# EAGLE board TouchPanel_ver _4 (EAGLE 6.1), part 1 of 2
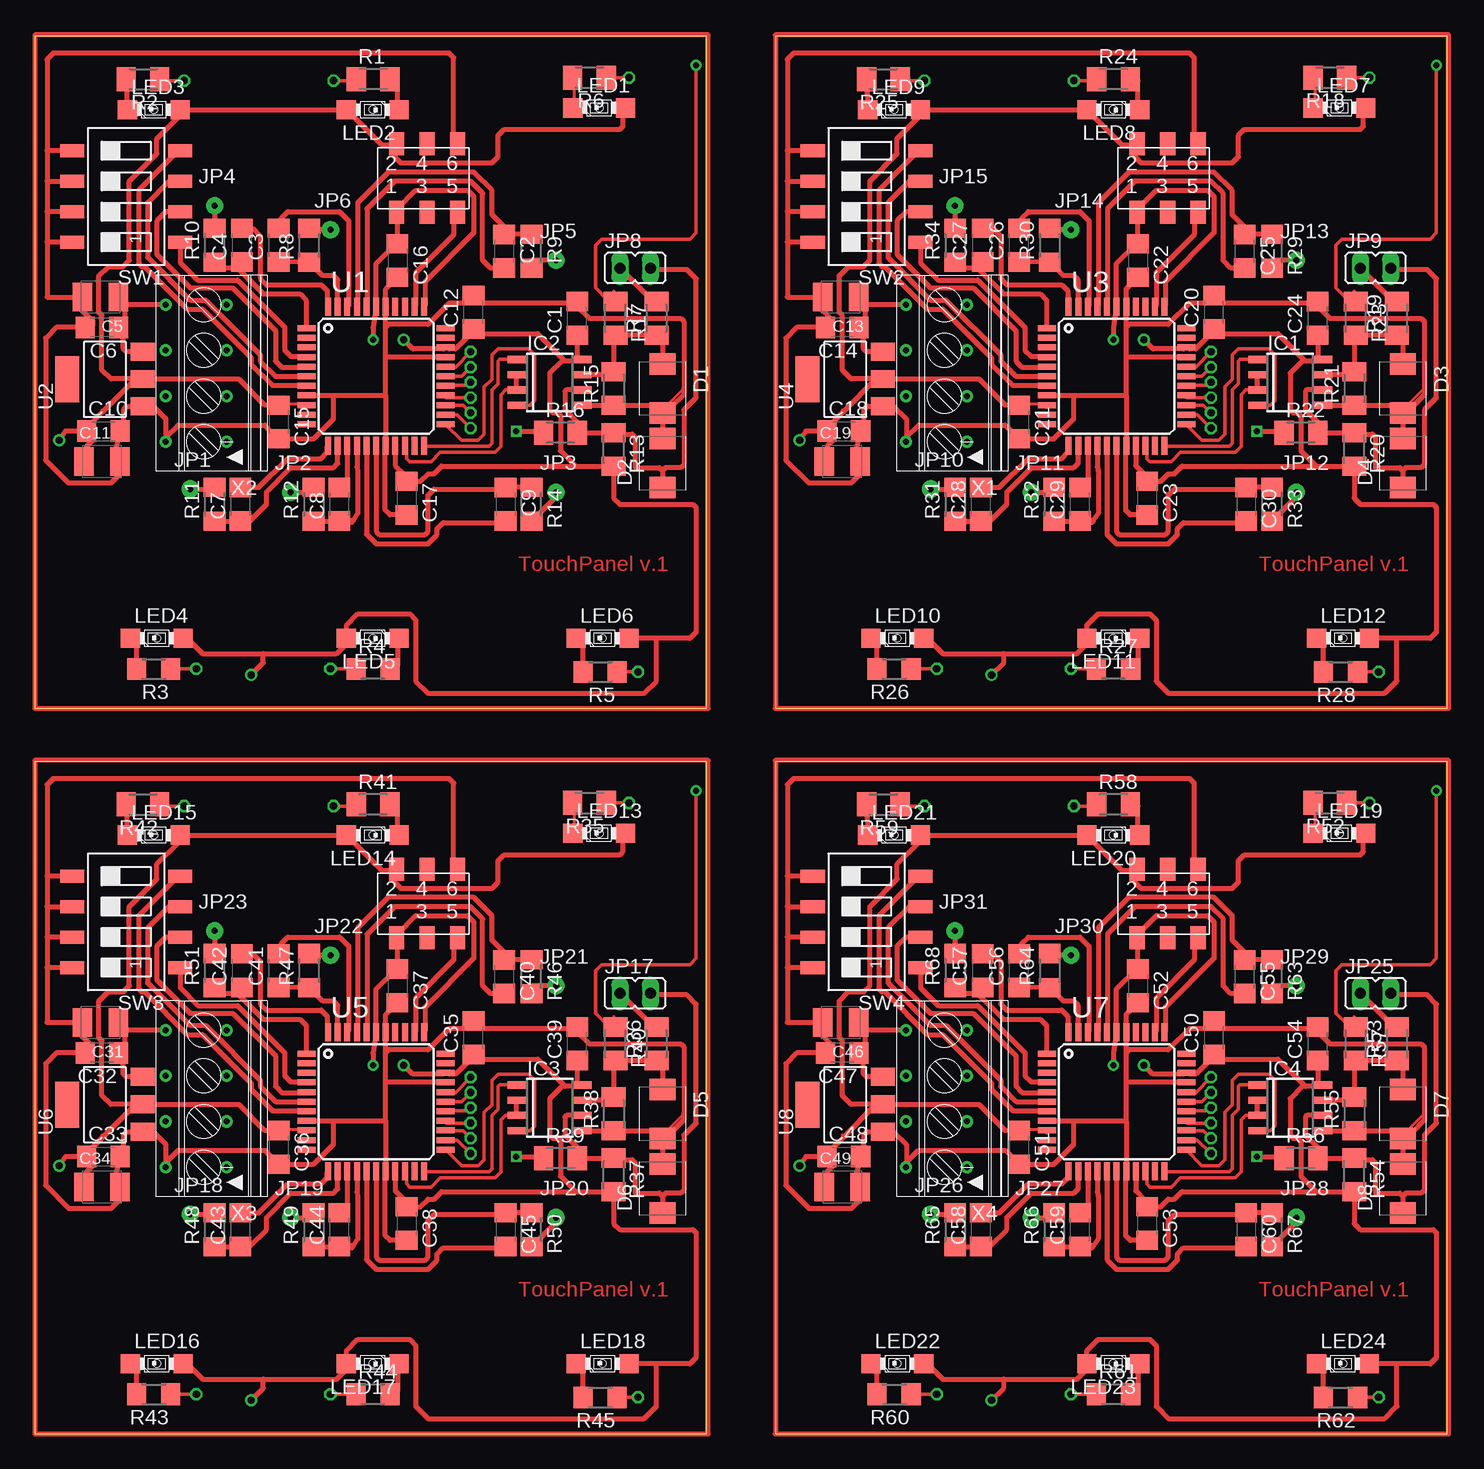
[diagram p0: board, top side]
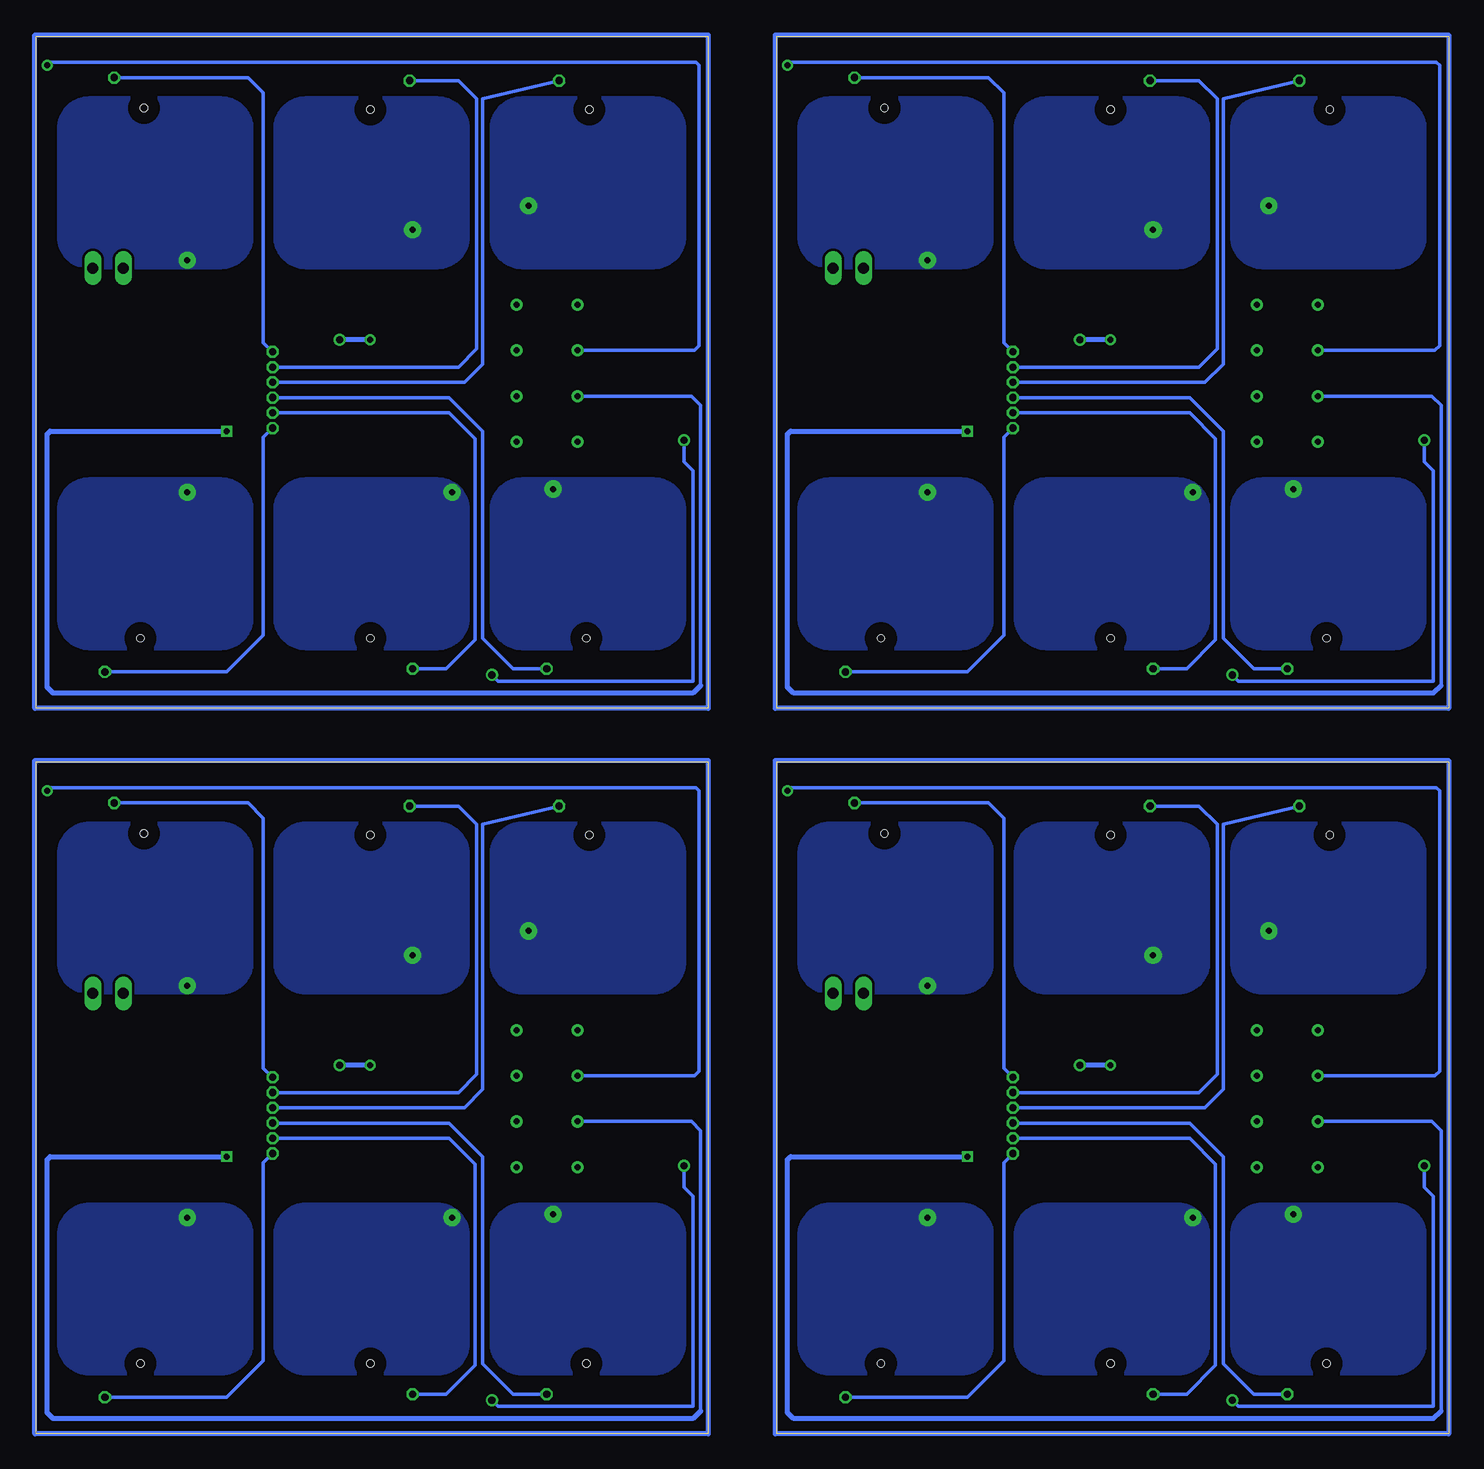
[diagram p1: board, bottom side, seen from below]

Size 117.72 x 116.45 mm. Coordinates in mm from the lower left corner, seen from the top.
Outline: 0,60.45 56,60.45 56,116.45 0,116.45 0,60.45
Outline: 61.72,60.45 117.72,60.45 117.72,116.45 61.72,116.45 61.72,60.45
Outline: 0,0 56,0 56,56 0,56 0,0
Outline: 61.72,0 117.72,0 117.72,56 61.72,56 61.72,0
Copper layers (1*16): Top 0.035mm / dielectric 1.5mm / Bottom 0.035mm
Design rules: minimum track width 10mil, minimum drill 24mil, track to track 8mil, track to pad 8mil, pad to pad 8mil, via to via 8mil, smd to smd 8mil, copper to edge 40mil, drill to drill 8mil, minimum pad ring 10mil, minimum via ring 8mil, stop-mask expansion 4mil, vias tented up to drill 0mil, thermal gap 10mil

## Footprints (pad centres in the part's own frame; a part is rotated, then mirrored left to right if it is on the bottom)
C1206 = smd 1.6 x 1.8: 1 -1.4,0; 2 1.4,0
SMC_B = smd 1.6 x 2.4: + -1.5,0; - 1.5,0
SMBJ = smd 1.78 x 2.16: A 2.04,0; C -2.03,0
D_R-PDSO-G8 = smd 0.6 x 1.5: 1 -1.905,-2.75; 2 -0.635,-2.75; 3 0.635,-2.75; 4 1.905,-2.75; 5 1.905,2.75; 6 0.635,2.75; 7 -0.635,2.75; 8 -1.905,2.75
1X01 = drill 0.5 pad 1.422: 1 0,0
2X03_SMD = smd 0.635 x 1.27: 1 0.635,-1.27; 2 0.635,3.81; 3 3.175,-1.27; 4 3.175,3.81; 5 5.715,-1.27; 6 5.715,3.81; P$1 1.27,3.81; P$2 3.81,3.81; P$3 6.35,3.81; P$4 1.27,-1.27; P$5 3.81,-1.27; P$6 6.35,-1.27; P$7 6.35,4.445; P$8 5.715,4.445; P$9 3.81,4.445; P$10 3.175,4.445; P$11 1.27,4.445; P$12 0.635,4.445; P$13 0.635,-1.905; P$14 1.27,-1.905; P$15 3.175,-1.905; P$16 3.81,-1.905; P$17 5.715,-1.905; P$18 6.35,-1.905
JP1 = drill 0.914 long: 1 0,-1.27; 2 0,1.27
MINI-TOPLED-SANTANA = smd 1.6 x 1.6: A 0,2.2; C 0,-2.2 | hole 0.6: 0,0
M1206 = smd 1.6 x 2: 1 -1.4,0; 2 1.4,0
R1206 = smd 1.6 x 1.803: 1 -1.422,0; 2 1.422,0
SMS-004 = smd 1.092 x 2.007: 1 -3.81,-4.496; 2 -1.27,-4.496; 3 1.27,-4.496; 4 3.81,-4.496; 5 3.81,4.496; 6 1.27,4.496; 7 -1.27,4.496; 8 -3.81,4.496
TQFP44 = smd 1.5 x 0.5: 1 -5.8,4; 2 -5.8,3.2; 3 -5.8,2.4; 4 -5.8,1.6; 5 -5.8,0.8; 6 -5.8,0; 7 -5.8,-0.8; 8 -5.8,-1.6; 9 -5.8,-2.4; 10 -5.8,-3.2; 11 -5.8,-4; 23 5.8,-4; 24 5.8,-3.2; 25 5.8,-2.4; 26 5.8,-1.6; 27 5.8,-0.8; 28 5.8,0; 29 5.8,0.8; 30 5.8,1.6; 31 5.8,2.4; 32 5.8,3.2; 33 5.8,4 | smd 0.5 x 1.5: 12 -4,-5.8; 13 -3.2,-5.8; 14 -2.4,-5.8; 15 -1.6,-5.8; 16 -0.8,-5.8; 17 0,-5.8; 18 0.8,-5.8; 19 1.6,-5.8; 20 2.4,-5.8; 21 3.2,-5.8; 22 4,-5.8; 34 4,5.8; 35 3.2,5.8; 36 2.4,5.8; 37 1.6,5.8; 38 0.8,5.8; 39 0,5.8; 40 -0.8,5.8; 41 -1.6,5.8; 42 -2.4,5.8; 43 -3.2,5.8; 44 -4,5.8
SOT223 = smd 1.499 x 2.007: 1 -2.261,-3.15; 2 0.025,-3.15; 3 2.311,-3.15 | smd 3.81 x 2.007: 4 0,3.15
1705566 = drill 0.5 pad 0.9: 1.1 -5.715,-1.25; 1.2 -5.715,3.83; 2.1 -1.905,-1.25; 2.2 -1.905,3.83; 3.1 1.905,-1.25; 3.2 1.905,3.83; 4.1 5.715,-1.25; 4.2 5.715,3.83

## Placement (x,y rotation side)
C1  100n  [C1206]  45.21,92.96 90 top
C2  22n  [C1206]  39.12,98.55 270 top
C3  22n  [C1206]  20.32,99.06 90 top
C4  22n  [C1206]  17.27,99.06 90 top
C5  10u/16  [SMC_B]  5.46,94.74 180 top
C6  100n  [C1206]  5.59,92.2 180 top
C7  22n  [C1206]  17.14,77.47 90 top
C8  22n  [C1206]  25.4,77.47 90 top
C9  22n  [C1206]  39.24,77.47 270 top
C10  100n  [C1206]  5.71,83.57 0 top
C11  10u/16  [SMC_B]  5.59,81.03 0 top
C12  100n  [C1206]  36.58,93.47 90 top
C13  10u/16  [SMC_B]  67.18,94.74 180 top
C14  100n  [C1206]  67.31,92.2 180 top
C15  100n  [C1206]  20.32,84.33 270 top
C16  100n  [C1206]  30.23,97.79 270 top
C17  100n  [C1206]  30.99,77.98 270 top
C18  100n  [C1206]  67.44,83.57 0 top
C19  10u/16  [SMC_B]  67.31,81.03 0 top
C20  100n  [C1206]  98.3,93.47 90 top
C21  100n  [C1206]  82.04,84.33 270 top
C22  100n  [C1206]  91.95,97.79 270 top
C23  100n  [C1206]  92.71,77.98 270 top
C24  100n  [C1206]  106.93,92.96 90 top
C25  22n  [C1206]  100.84,98.55 270 top
C26  22n  [C1206]  82.04,99.06 90 top
C27  22n  [C1206]  78.99,99.06 90 top
C28  22n  [C1206]  78.87,77.47 90 top
C29  22n  [C1206]  87.12,77.47 90 top
C30  22n  [C1206]  100.97,77.47 270 top
C31  10u/16  [SMC_B]  5.46,34.29 180 top
C32  100n  [C1206]  5.59,31.75 180 top
C33  100n  [C1206]  5.71,23.11 0 top
C34  10u/16  [SMC_B]  5.59,20.57 0 top
C35  100n  [C1206]  36.58,33.02 90 top
C36  100n  [C1206]  20.32,23.88 270 top
C37  100n  [C1206]  30.23,37.34 270 top
C38  100n  [C1206]  30.99,17.53 270 top
C39  100n  [C1206]  45.21,32.51 90 top
C40  22n  [C1206]  39.12,38.1 270 top
C41  22n  [C1206]  20.32,38.61 90 top
C42  22n  [C1206]  17.27,38.61 90 top
C43  22n  [C1206]  17.14,17.02 90 top
C44  22n  [C1206]  25.4,17.02 90 top
C45  22n  [C1206]  39.24,17.02 270 top
C46  10u/16  [SMC_B]  67.18,34.29 180 top
C47  100n  [C1206]  67.31,31.75 180 top
C48  100n  [C1206]  67.44,23.11 0 top
C49  10u/16  [SMC_B]  67.31,20.57 0 top
C50  100n  [C1206]  98.3,33.02 90 top
C51  100n  [C1206]  82.04,23.88 270 top
C52  100n  [C1206]  91.95,37.34 270 top
C53  100n  [C1206]  92.71,17.53 270 top
C54  100n  [C1206]  106.93,32.51 90 top
C55  22n  [C1206]  100.84,38.1 270 top
C56  22n  [C1206]  82.04,38.61 90 top
C57  22n  [C1206]  78.99,38.61 90 top
C58  22n  [C1206]  78.87,17.02 90 top
C59  22n  [C1206]  87.12,17.02 90 top
C60  22n  [C1206]  100.97,17.02 270 top
D1  [SMBJ]  52.32,87.12 270 top
D2  [SMBJ]  52.32,80.9 90 top
D3  [SMBJ]  114.05,87.12 270 top
D4  [SMBJ]  114.05,80.9 90 top
D5  [SMBJ]  52.32,26.67 270 top
D6  [SMBJ]  52.32,20.45 90 top
D7  [SMBJ]  114.05,26.67 270 top
D8  [SMBJ]  114.05,20.45 90 top
IC1  ST3485  [D_R-PDSO-G8]  104.65,87.63 270 top
IC2  ST3485  [D_R-PDSO-G8]  42.93,87.63 270 top
IC3  ST3485  [D_R-PDSO-G8]  42.93,27.18 270 top
IC4  ST3485  [D_R-PDSO-G8]  104.65,27.18 270 top
JP1  [1X01]  12.95,78.74 0 top
JP2  [1X01]  21.34,78.49 0 top
JP3  [1X01]  43.43,78.49 0 top
JP4  [1X01]  14.99,102.36 0 top
JP5  [1X01]  43.43,97.79 0 top
JP6  [1X01]  24.64,100.33 0 top
JP7  PINHD-2X3_SMDSMD  [2X03_SMD]  29.21,103.38 0 top
JP8  terminator  [JP1]  50.04,97.16 270 top
JP9  terminator  [JP1]  111.76,97.16 270 top
JP10  [1X01]  74.68,78.74 0 top
JP11  [1X01]  83.06,78.49 0 top
JP12  [1X01]  105.16,78.49 0 top
JP13  [1X01]  105.16,97.79 0 top
JP14  [1X01]  86.36,100.33 0 top
JP15  [1X01]  76.71,102.36 0 top
JP16  PINHD-2X3_SMDSMD  [2X03_SMD]  90.93,103.38 0 top
JP17  terminator  [JP1]  50.04,36.7 270 top
JP18  [1X01]  12.95,18.29 0 top
JP19  [1X01]  21.34,18.03 0 top
JP20  [1X01]  43.43,18.03 0 top
JP21  [1X01]  43.43,37.34 0 top
JP22  [1X01]  24.64,39.88 0 top
JP23  [1X01]  14.99,41.91 0 top
JP24  PINHD-2X3_SMDSMD  [2X03_SMD]  29.21,42.93 0 top
JP25  terminator  [JP1]  111.76,36.7 270 top
JP26  [1X01]  74.68,18.29 0 top
JP27  [1X01]  83.06,18.03 0 top
JP28  [1X01]  105.16,18.03 0 top
JP29  [1X01]  105.16,37.34 0 top
JP30  [1X01]  86.36,39.88 0 top
JP31  [1X01]  76.71,41.91 0 top
JP32  PINHD-2X3_SMDSMD  [2X03_SMD]  90.93,42.93 0 top
LED1  green  [MINI-TOPLED-SANTANA]  47.04,110.5 270 top
LED2  green  [MINI-TOPLED-SANTANA]  28.17,110.36 90 top
LED3  green  [MINI-TOPLED-SANTANA]  9.91,110.36 270 top
LED4  green  [MINI-TOPLED-SANTANA]  10.17,66.3 270 top
LED5  green  [MINI-TOPLED-SANTANA]  28.17,66.3 90 top
LED6  green  [MINI-TOPLED-SANTANA]  47.33,66.3 270 top
LED7  green  [MINI-TOPLED-SANTANA]  108.76,110.5 270 top
LED8  green  [MINI-TOPLED-SANTANA]  89.9,110.36 90 top
LED9  green  [MINI-TOPLED-SANTANA]  71.63,110.36 270 top
LED10  green  [MINI-TOPLED-SANTANA]  71.89,66.3 270 top
LED11  green  [MINI-TOPLED-SANTANA]  89.9,66.3 90 top
LED12  green  [MINI-TOPLED-SANTANA]  109.05,66.3 270 top
LED13  green  [MINI-TOPLED-SANTANA]  47.04,50.04 270 top
LED14  green  [MINI-TOPLED-SANTANA]  28.17,49.91 90 top
LED15  green  [MINI-TOPLED-SANTANA]  9.91,49.91 270 top
LED16  green  [MINI-TOPLED-SANTANA]  10.17,5.85 270 top
LED17  green  [MINI-TOPLED-SANTANA]  28.17,5.85 90 top
LED18  green  [MINI-TOPLED-SANTANA]  47.33,5.85 270 top
LED19  green  [MINI-TOPLED-SANTANA]  108.76,50.04 270 top
LED20  green  [MINI-TOPLED-SANTANA]  89.9,49.91 90 top
LED21  green  [MINI-TOPLED-SANTANA]  71.63,49.91 270 top
LED22  green  [MINI-TOPLED-SANTANA]  71.89,5.85 270 top
LED23  green  [MINI-TOPLED-SANTANA]  89.9,5.85 90 top
LED24  green  [MINI-TOPLED-SANTANA]  109.05,5.85 270 top
R1  220  [M1206]  28.19,112.9 0 top
R2  220  [M1206]  9.02,112.9 180 top
R3  220  [R1206]  9.91,63.75 180 top
R4  220  [R1206]  28.19,63.75 0 top
R5  220  [R1206]  47.12,63.5 180 top
R6  220  [M1206]  46.23,113.03 180 top
R7  130R  [M1206]  51.82,92.96 90 top
R8  10k  [R1206]  22.86,99.06 90 top
R9  10k  [R1206]  41.4,98.55 270 top
R10  10k  [R1206]  14.99,99.06 90 top
R11  10k  [R1206]  14.99,77.47 90 top
R12  10k  [R1206]  23.24,77.47 90 top
R13  750R  [M1206]  48.26,82.04 270 top
R14  10k  [R1206]  41.4,77.47 270 top
R15  750R  [M1206]  48.26,87.12 90 top
R16  10R  [M1206]  43.81,83.44 0 top
R17  10R  [M1206]  48.39,92.96 270 top
R18  220  [M1206]  107.95,113.03 180 top
R19  130R  [M1206]  113.54,92.96 90 top
R20  750R  [M1206]  109.98,82.04 270 top
R21  750R  [M1206]  109.98,87.12 90 top
R22  10R  [M1206]  105.54,83.44 0 top
R23  10R  [M1206]  110.11,92.96 270 top
R24  220  [M1206]  89.92,112.9 0 top
R25  220  [M1206]  70.74,112.9 180 top
R26  220  [R1206]  71.63,63.75 180 top
R27  220  [R1206]  89.92,63.75 0 top
R28  220  [R1206]  108.84,63.5 180 top
R29  10k  [R1206]  103.12,98.55 270 top
R30  10k  [R1206]  84.58,99.06 90 top
R31  10k  [R1206]  76.71,77.47 90 top
R32  10k  [R1206]  84.96,77.47 90 top
R33  10k  [R1206]  103.12,77.47 270 top
R34  10k  [R1206]  76.71,99.06 90 top
R35  220  [M1206]  46.23,52.58 180 top
R36  130R  [M1206]  51.82,32.51 90 top
R37  750R  [M1206]  48.26,21.59 270 top
R38  750R  [M1206]  48.26,26.67 90 top
R39  10R  [M1206]  43.81,22.99 0 top
R40  10R  [M1206]  48.39,32.51 270 top
R41  220  [M1206]  28.19,52.45 0 top
R42  220  [M1206]  9.02,52.45 180 top
R43  220  [R1206]  9.91,3.3 180 top
R44  220  [R1206]  28.19,3.3 0 top
R45  220  [R1206]  47.12,3.05 180 top
R46  10k  [R1206]  41.4,38.1 270 top
R47  10k  [R1206]  22.86,38.61 90 top
R48  10k  [R1206]  14.99,17.02 90 top
R49  10k  [R1206]  23.24,17.02 90 top
R50  10k  [R1206]  41.4,17.02 270 top
R51  10k  [R1206]  14.99,38.61 90 top
R52  220  [M1206]  107.95,52.58 180 top
R53  130R  [M1206]  113.54,32.51 90 top
R54  750R  [M1206]  109.98,21.59 270 top
R55  750R  [M1206]  109.98,26.67 90 top
R56  10R  [M1206]  105.54,22.99 0 top
R57  10R  [M1206]  110.11,32.51 270 top
R58  220  [M1206]  89.92,52.45 0 top
R59  220  [M1206]  70.74,52.45 180 top
R60  220  [R1206]  71.63,3.3 180 top
R61  220  [R1206]  89.92,3.3 0 top
R62  220  [R1206]  108.84,3.05 180 top
R63  10k  [R1206]  103.12,38.1 270 top
R64  10k  [R1206]  84.58,38.61 90 top
R65  10k  [R1206]  76.71,17.02 90 top
R66  10k  [R1206]  84.96,17.02 90 top
R67  10k  [R1206]  103.12,17.02 270 top
R68  10k  [R1206]  76.71,38.61 90 top
SW1  SWS004  [SMS-004]  7.62,103.12 90 top
SW2  SWS004  [SMS-004]  69.34,103.12 90 top
SW3  SWS004  [SMS-004]  7.62,42.67 90 top
SW4  SWS004  [SMS-004]  69.34,42.67 90 top
U1  XMEGA-A4TQFP  [TQFP44]  28.45,88.14 0 top
U2  SPX1117M3-L-3-3  [SOT223]  5.84,87.88 90 top
U3  XMEGA-A4TQFP  [TQFP44]  90.17,88.14 0 top
U4  SPX1117M3-L-3-3  [SOT223]  67.56,87.88 90 top
U5  XMEGA-A4TQFP  [TQFP44]  28.45,27.69 0 top
U6  SPX1117M3-L-3-3  [SOT223]  5.84,27.43 90 top
U7  XMEGA-A4TQFP  [TQFP44]  90.17,27.69 0 top
U8  SPX1117M3-L-3-3  [SOT223]  67.56,27.43 90 top
X1  1705566  [1705566]  76.45,88.39 90 top
X2  1705566  [1705566]  14.73,88.39 90 top
X3  1705566  [1705566]  14.73,27.94 90 top
X4  1705566  [1705566]  76.45,27.94 90 top

## Library data of the parts
C1-C60 R1-R68 = rcl
D1-D8 = diode
IC1-IC4 = 751xx
JP1-JP7 JP10-JP16 JP18-JP24 JP26-JP32 = pinhead
JP8 JP9 JP17 JP25 = jumper
LED1-LED24 = led
SW1-SW4 = smd-special
U1 U3 U5 U7 = avr-7
U2 U4 U6 U8 = burr-brown; MPN: REG1117; OC_FARNELL: 1097566; OC_NEWARK: 14P6981
X1-X4 = con-phoenix-3.81; OC_FARNELL: unknown; OC_NEWARK: unknown

## Nets
+3V1: C18.1 C19.+ C20.1 C21.1 C22.1 C23.1 C24.1 IC1.8 JP16.2 LED7.A LED8.A LED9.A LED10.A LED11.A LED12.A R20.2 U3.9 U3.19 U3.31 U3.39 U4.2
+3V2: C33.1 C34.+ C35.1 C36.1 C37.1 C38.1 C39.1 IC3.8 JP24.2 LED13.A LED14.A LED15.A LED16.A LED17.A LED18.A R37.2 U5.9 U5.19 U5.31 U5.39 U6.2
+3V3: C1.1 C10.1 C11.+ C12.1 C15.1 C16.1 C17.1 IC2.8 JP7.2 LED1.A LED2.A LED3.A LED4.A LED5.A LED6.A R13.2 U1.9 U1.19 U1.31 U1.39 U2.2
+3V4: C48.1 C49.+ C50.1 C51.1 C52.1 C53.1 C54.1 IC4.8 JP32.2 LED19.A LED20.A LED21.A LED22.A LED23.A LED24.A R54.2 U7.9 U7.19 U7.31 U7.39 U8.2
+5V: C5.+ C6.1 U2.3 X2.4.2
+5V1: C13.+ C14.1 U4.3 X1.4.2
+5V2: C31.+ C32.1 U6.3 X3.4.2
+5V3: C46.+ C47.1 U8.3 X4.4.2
GND: C1.2 C5.- C6.2 C10.2 C11.- C12.2 C15.2 C16.2 C17.2 D1.A D2.A IC2.5 JP7.6 R15.1 SW1.5 SW1.6 SW1.7 SW1.8 U1.8 U1.18 U1.30 U1.38 U2.1 X2.1.2
GND1: C13.- C14.2 C18.2 C19.- C20.2 C21.2 C22.2 C23.2 C24.2 D3.A D4.A IC1.5 JP16.6 R21.1 SW2.5 SW2.6 SW2.7 SW2.8 U3.8 U3.18 U3.30 U3.38 U4.1 X1.1.2
GND2: C31.- C32.2 C33.2 C34.- C35.2 C36.2 C37.2 C38.2 C39.2 D5.A D6.A IC3.5 JP24.6 R38.1 SW3.5 SW3.6 SW3.7 SW3.8 U5.8 U5.18 U5.30 U5.38 U6.1 X3.1.2
GND3: C46.- C47.2 C48.2 C49.- C50.2 C51.2 C52.2 C53.2 C54.2 D7.A D8.A IC4.5 JP32.6 R55.1 SW4.5 SW4.6 SW4.7 SW4.8 U7.8 U7.18 U7.30 U7.38 U8.1 X4.1.2
JP1: JP1.1 R11.2
JP2: JP2.1 R12.2
JP3: JP3.1 R14.2
JP4: JP4.1 R10.2
JP5: JP5.1 R9.2
JP6: JP6.1 R8.2
JP7: JP10.1 R31.2
JP8: JP11.1 R32.2
JP9: JP12.1 R33.2
JP10: JP13.1 R29.2
JP11: JP15.1 R34.2
JP12: JP14.1 R30.2
JP13: JP18.1 R48.2
JP14: JP19.1 R49.2
JP15: JP20.1 R50.2
JP16: JP21.1 R46.2
JP17: JP23.1 R51.2
JP18: JP22.1 R47.2
JP19: JP26.1 R65.2
JP20: JP27.1 R66.2
JP21: JP28.1 R67.2
JP22: JP29.1 R63.2
JP23: JP31.1 R68.2
JP24: JP30.1 R64.2
N$1: LED2.C R1.2
N$2: LED3.C R2.2
N$3: LED4.C R3.2
N$4: LED5.C R4.2
N$5: LED6.C R5.2
N$6: R17.1 X2.3.2
N$7: JP8.1 R7.2
N$8: R16.1 X2.2.2
N$9: D1.C IC2.7 R7.1 R15.2 R17.2
N$10: JP7.1 U1.34
N$11: JP7.5 U1.35
N$12: LED1.C R6.2
N$13: C2.1 R9.1 U1.41
N$14: C2.2 U1.40
N$15: C9.2 U1.16
N$16: C3.1 R8.1 U1.43
N$17: C8.2 U1.14
N$18: C4.1 R10.1 U1.1
N$20: C7.2 U1.12
N$21: C9.1 R14.1 U1.17
N$22: SW1.1 U1.4
N$23: SW1.4 U1.7
N$24: SW1.2 U1.5
N$25: SW1.3 U1.6
N$26: C8.1 R12.1 U1.15
N$27: C3.2 U1.42
N$28: C7.1 R11.1 U1.13
N$29: C4.2 U1.44
N$30: LED7.C R18.2
N$31: JP9.1 R19.2
N$32: D3.C IC1.7 R19.1 R21.2 R23.2
N$33: LED8.C R24.2
N$35: LED9.C R25.2
N$37: LED10.C R26.2
N$38: LED11.C R27.2
N$39: LED12.C R28.2
N$41: C25.1 R29.1 U3.41
N$42: C25.2 U3.40
N$43: C26.1 R30.1 U3.43
N$44: C27.1 R34.1 U3.1
N$45: C30.1 R33.1 U3.17
N$46: C29.1 R32.1 U3.15
N$47: C28.1 R31.1 U3.13
N$48: C30.2 U3.16
N$49: C29.2 U3.14
N$50: C28.2 U3.12
N$51: C26.2 U3.42
N$52: C27.2 U3.44
N$54: JP16.1 U3.34
N$55: JP16.5 U3.35
N$56: SW2.1 U3.4
N$57: SW2.4 U3.7
N$58: SW2.2 U3.5
N$59: SW2.3 U3.6
N$60: R23.1 X1.3.2
N$61: R22.1 X1.2.2
N$63: LED13.C R35.2
N$64: JP17.1 R36.2
N$65: D5.C IC3.7 R36.1 R38.2 R40.2
N$66: LED14.C R41.2
N$67: LED15.C R42.2
N$68: LED16.C R43.2
N$69: LED17.C R44.2
N$70: LED18.C R45.2
N$72: C40.1 R46.1 U5.41
N$73: C40.2 U5.40
N$74: C41.1 R47.1 U5.43
N$75: C42.1 R51.1 U5.1
N$76: C45.1 R50.1 U5.17
N$77: C44.1 R49.1 U5.15
N$78: C43.1 R48.1 U5.13
N$79: C45.2 U5.16
N$80: C44.2 U5.14
N$81: C43.2 U5.12
N$82: C41.2 U5.42
N$83: C42.2 U5.44
N$85: JP24.1 U5.34
N$86: JP24.5 U5.35
N$87: SW3.1 U5.4
N$88: SW3.4 U5.7
N$89: SW3.2 U5.5
N$90: SW3.3 U5.6
N$91: R40.1 X3.3.2
N$92: R39.1 X3.2.2
N$94: LED19.C R52.2
N$95: JP25.1 R53.2
N$96: D7.C IC4.7 R53.1 R55.2 R57.2
N$97: LED20.C R58.2
N$98: LED21.C R59.2
N$99: LED22.C R60.2
N$100: LED23.C R61.2
N$101: LED24.C R62.2
N$103: C55.1 R63.1 U7.41
N$104: C55.2 U7.40
N$105: C56.1 R64.1 U7.43
N$106: C57.1 R68.1 U7.1
N$107: C60.1 R67.1 U7.17
N$108: C59.1 R66.1 U7.15
N$109: C58.1 R65.1 U7.13
N$110: C60.2 U7.16
N$111: C59.2 U7.14
N$112: C58.2 U7.12
N$113: C56.2 U7.42
N$114: C57.2 U7.44
N$116: JP32.1 U7.34
N$117: JP32.5 U7.35
N$118: SW4.1 U7.4
N$119: SW4.4 U7.7
N$120: SW4.2 U7.5
N$121: SW4.3 U7.6
N$122: R57.1 X4.3.2
N$123: R56.1 X4.2.2
PD_0: IC2.2 IC2.3 U1.20
PD_1: IC1.2 IC1.3 U3.20
PD_2: IC2.1 U1.22
PD_3: IC2.4 U1.23
PD_4: R5.1 U1.24
PD_5: R4.1 U1.25
PD_6: R3.1 U1.26
PD_7: R2.1 U1.27
PD_8: IC1.1 U3.22
PD_9: IC1.4 U3.23
PD_10: R28.1 U3.24
PD_11: R27.1 U3.25
PD_12: R26.1 U3.26
PD_13: R25.1 U3.27
PD_14: IC3.2 IC3.3 U5.20
PD_15: IC3.1 U5.22
PD_16: IC3.4 U5.23
PD_17: R45.1 U5.24
PD_18: R44.1 U5.25
PD_19: R43.1 U5.26
PD_20: R42.1 U5.27
PD_21: IC4.2 IC4.3 U7.20
PD_22: IC4.1 U7.22
PD_23: IC4.4 U7.23
PD_24: R62.1 U7.24
PD_25: R61.1 U7.25
PD_26: R60.1 U7.26
PD_27: R59.1 U7.27
PE_0: R1.1 U1.28
PE_1: R6.1 U1.29
PE_2: R24.1 U3.28
PE_3: R18.1 U3.29
PE_4: R41.1 U5.28
PE_5: R35.1 U5.29
PE_6: R58.1 U7.28
PE_7: R52.1 U7.29
RS485_A1: D2.C IC2.6 JP8.2 R13.1 R16.2
RS485_A2: D4.C IC1.6 JP9.2 R20.1 R22.2
RS485_A3: D6.C IC3.6 JP17.2 R37.1 R39.2
RS485_A4: D8.C IC4.6 JP25.2 R54.1 R56.2